# EAGLE board T14_SuperDuperBoardLayoutV01 (EAGLE 6.3)
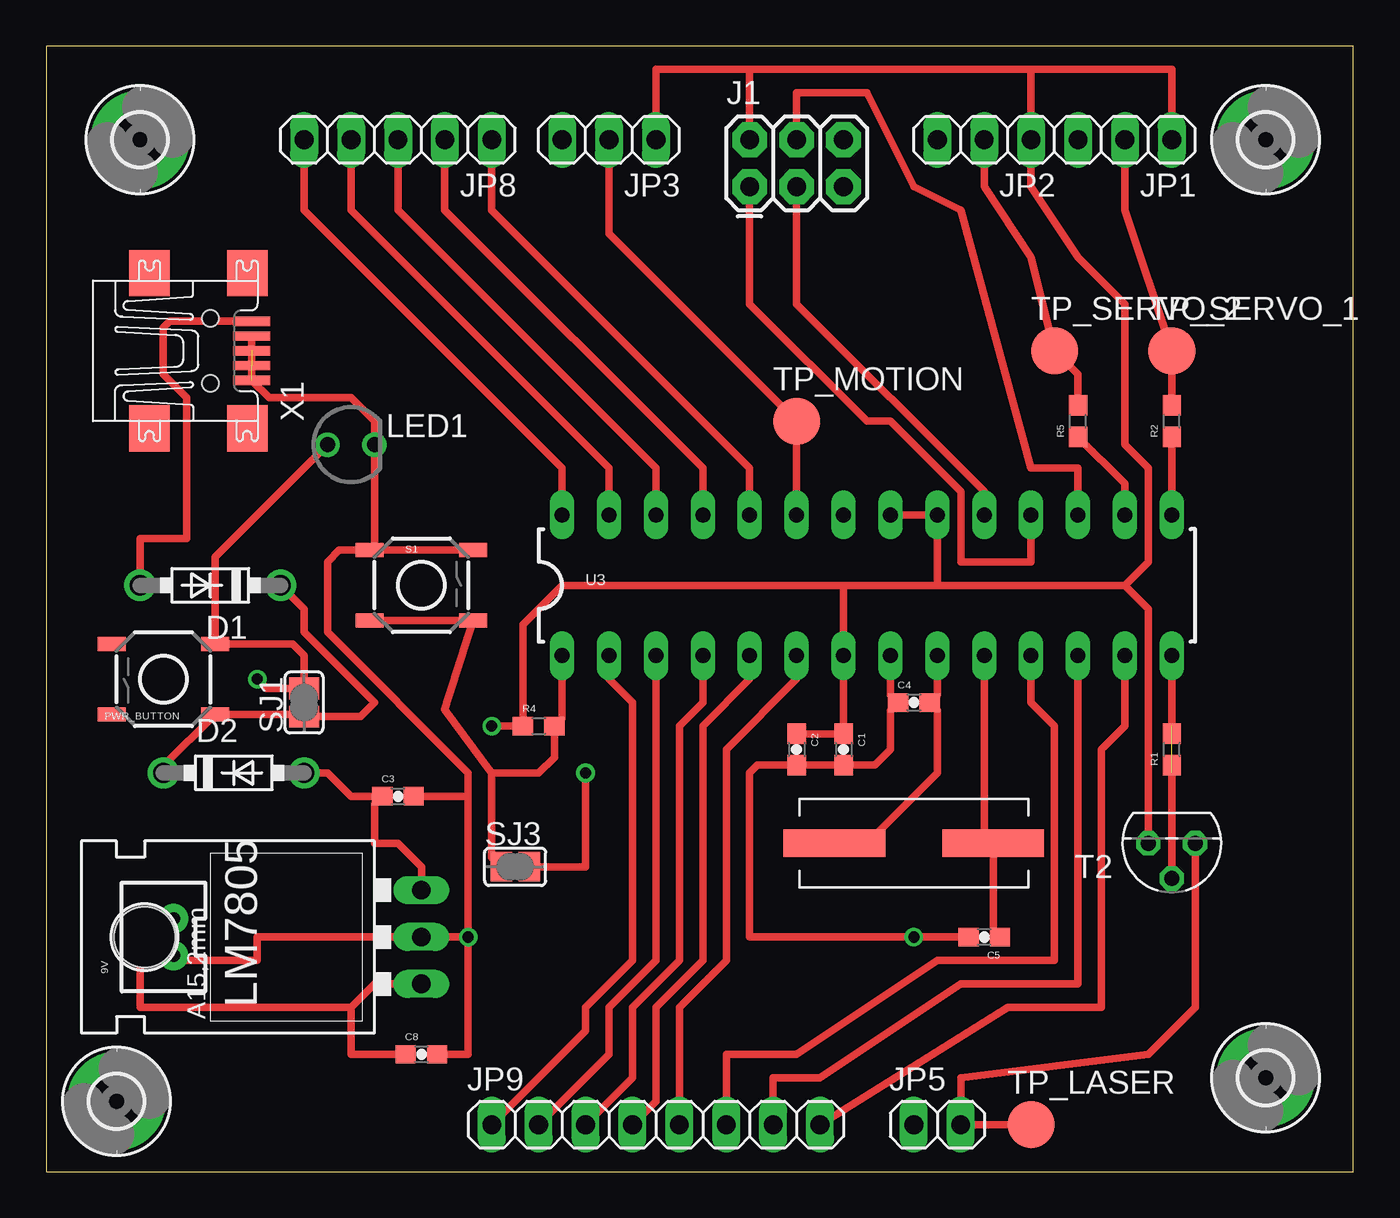
[diagram p0: board, top side]
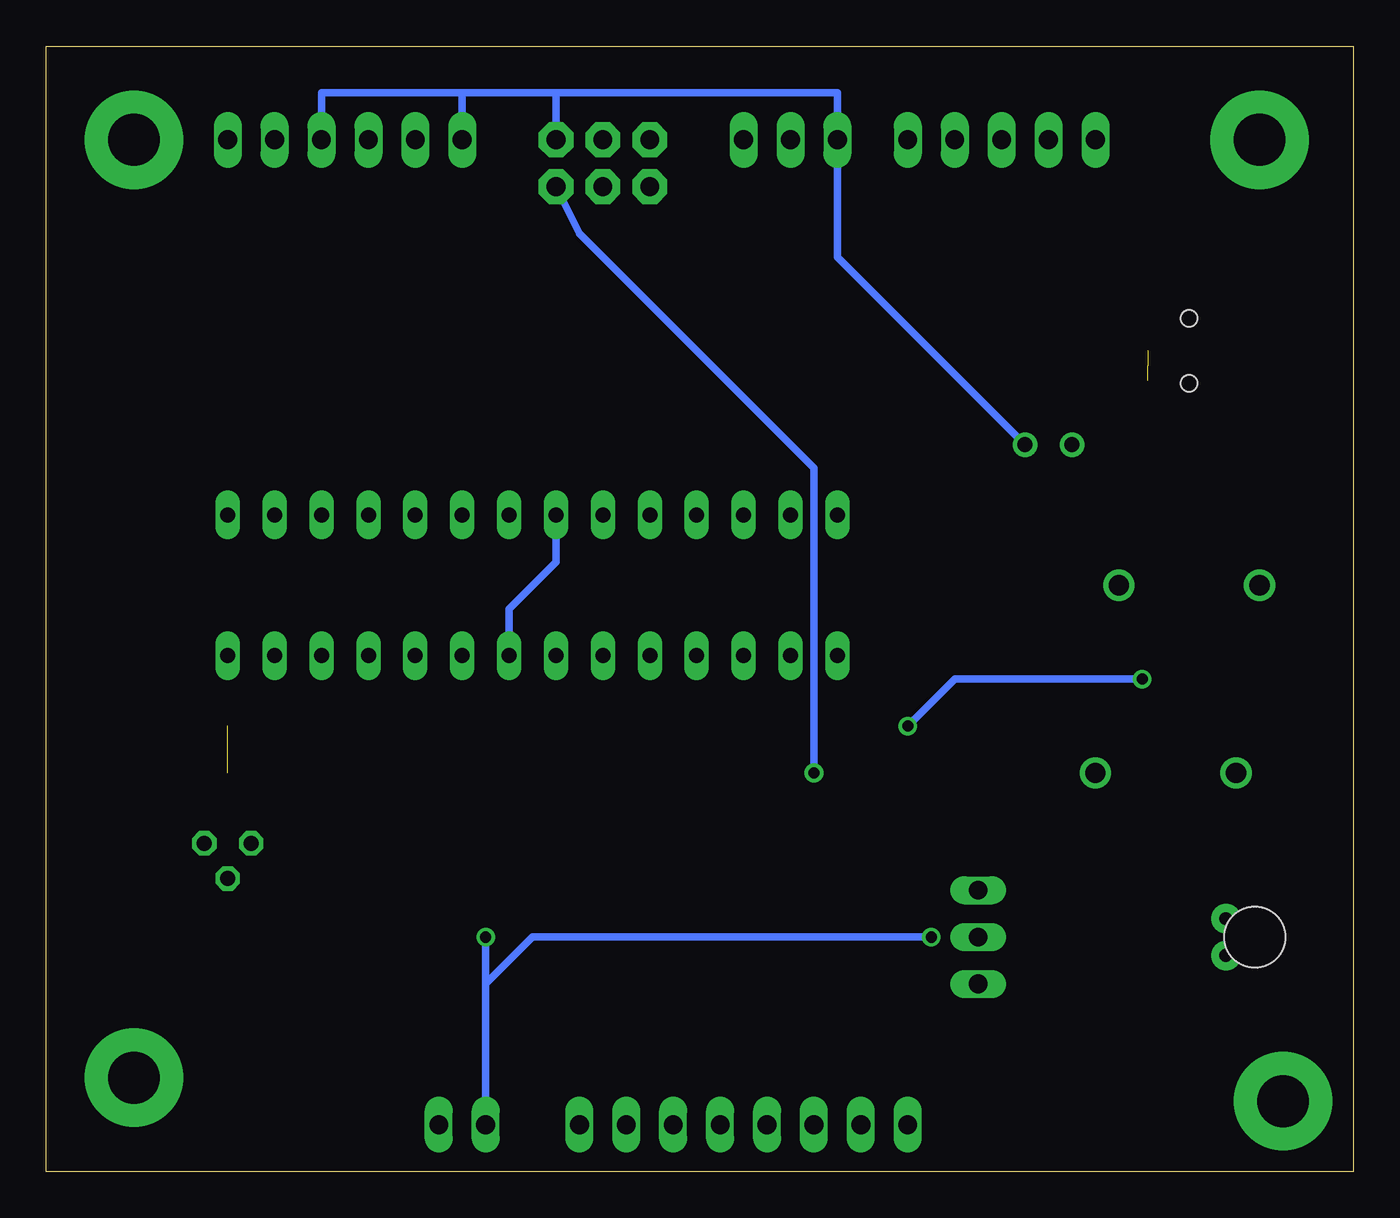
[diagram p1: board, bottom side, seen from below]

Size 70.79 x 60.95 mm. Coordinates in mm from the lower left corner, seen from the top.
Outline: 0,0 70.79,0 70.79,60.95 0,60.95 0,0
Copper layers (1*16): Top 0.035mm / dielectric 1.5mm / Bottom 0.035mm
Design rules "default": minimum track width 10mil, minimum drill 24mil, track to track 8mil, track to pad 8mil, pad to pad 8mil, via to via 8mil, smd to smd 8mil, copper to edge 40mil, drill to drill 8mil, minimum pad ring 10mil, minimum via ring 8mil, stop-mask expansion 4mil, vias tented up to drill 0mil, thermal gap 10mil

## Footprints (pad centres in the part's own frame; a part is rotated, then mirrored left to right if it is on the bottom)
JST-2-PTH-VERT = drill 0.7 pad 1.6: 1 -1,-0.55; 2 1,-0.55
0603-CAP = smd 1.1 x 1: 1 -0.85,0; 2 0.85,0
DO41-7.6 = drill 1.1 pad 1.7: A 3.81,0; C -3.81,0
2,8-PAD = drill 2.8 pad 5.334: B2,8 0,0
2X3 = drill 1.016 pad 1.88 octagon: 1 0,0; 2 0,2.54; 3 2.54,0; 4 2.54,2.54; 5 5.08,0; 6 5.08,2.54
1X03 = drill 1.016 long: 1 -2.54,0; 2 0,0; 3 2.54,0
1X02 = drill 1.016 long: 1 -1.27,0; 2 1.27,0
1X05 = drill 1.016 long: 1 -5.08,0; 2 -2.54,0; 3 0,0; 4 2.54,0; 5 5.08,0
1X08 = drill 1.016 long: 1 -8.89,0; 2 -6.35,0; 3 -3.81,0; 4 -1.27,0; 5 1.27,0; 6 3.81,0; 7 6.35,0; 8 8.89,0
LED3MM-NS = drill 0.813: A -1.27,0; K 1.27,0
78XXL = drill 1.016 long: GND 0,-3.81; IN -2.54,-3.81; OUT 2.54,-3.81 | hole 3.302: 0,11.176
TACTILE-SWITCH-SMD = smd 1.524 x 0.762: 1 -2.794,1.905; 2 2.794,1.905; 3 -2.794,-1.905; 4 2.794,-1.905
0603 = smd 1.1 x 1: 1 -0.85,0; 2 0.85,0
SJ = smd 1.168 x 1.6: 1 -0.762,0; 2 0.762,0
TO92 = drill 0.813 octagon: 1 1.27,0; 2 0,1.905; 3 -1.27,0
B2,54 = smd 2.54 x 2.54: TP 0,0
DIL28-3 = drill 0.813 long: 1 -16.51,-3.81; 2 -13.97,-3.81; 3 -11.43,-3.81; 4 -8.89,-3.81; 5 -6.35,-3.81; 6 -3.81,-3.81; 7 -1.27,-3.81; 8 1.27,-3.81; 9 3.81,-3.81; 10 6.35,-3.81; 11 8.89,-3.81; 12 11.43,-3.81; 13 13.97,-3.81; 14 16.51,-3.81; 15 16.51,3.81; 16 13.97,3.81; 17 11.43,3.81; 18 8.89,3.81; 19 6.35,3.81; 20 3.81,3.81; 21 1.27,3.81; 22 -1.27,3.81; 23 -3.81,3.81; 24 -6.35,3.81; 25 -8.89,3.81; 26 -11.43,3.81; 27 -13.97,3.81; 28 -16.51,3.81
UX60-MB-5ST = smd 2 x 0.5: 1 2.25,1.6; 2 2.25,0.8; 3 2.25,0; 4 2.25,-0.8; 5 2.25,-1.6 | smd 2.2 x 2.5: M1 -3.3,-4.2; M2 -3.3,4.2; M3 2,4.2; M4 2,-4.2 | hole 0.9: 0,-1.75; 0,1.75
CRYSTAL-SMD-10.5X4.8-2PIN = smd 5.5 x 1.5: P$1 -4.3,0; P$2 4.3,0

## Placement (x,y rotation side)
9V  M02JST-PTH-VERT  [JST-2-PTH-VERT]  6.35,12.7 90 top
C1  4.7uF  [0603-CAP]  43.18,22.86 270 top
C2  0.1uF  [0603-CAP]  40.64,22.86 270 top
C3  1uF  [0603-CAP]  19.05,20.32 0 top
C4  22pF  [0603-CAP]  46.99,25.4 0 top
C5  22pF  [0603-CAP]  50.8,12.7 180 top
C8  10uF  [0603-CAP]  20.32,6.35 0 top
D1  1N5817-B  [DO41-7.6]  8.89,31.75 180 top
D2  1N5817-B  [DO41-7.6]  10.16,21.59 0 top
H5  MOUNT-PAD-ROUND2.8  [2,8-PAD]  5.08,55.88 0 top
H6  MOUNT-PAD-ROUND2.8  [2,8-PAD]  3.81,3.81 0 top
H7  MOUNT-PAD-ROUND2.8  [2,8-PAD]  66.04,5.08 0 top
H8  MOUNT-PAD-ROUND2.8  [2,8-PAD]  66.04,55.88 0 top
J1  AVR_SPI_PRG_6PTH  [2X3]  38.1,53.34 0 top
JP1  [1X03]  58.42,55.88 180 top
JP2  [1X03]  50.8,55.88 180 top
JP3  [1X03]  30.48,55.88 180 top
JP5  [1X02]  48.26,2.54 0 top
JP8  [1X05]  19.05,55.88 180 top
JP9  [1X08]  33.02,2.54 0 top
LED1  [LED3MM-NS]  16.51,39.37 0 top
LM7805  [78XXL]  16.51,12.7 90 top
PWR_BUTTON  SWITCH-MOMENTARY-2SMD  [TACTILE-SWITCH-SMD]  6.35,26.67 180 top
R1  1k  [0603]  60.96,22.86 90 top
R2  33OHM  [0603]  60.96,40.64 90 top
R4  10k  [0603]  26.67,24.13 0 top
R5  33OHM  [0603]  55.88,40.64 90 top
S1  TAC_SWITCHSMD  [TACTILE-SWITCH-SMD]  20.32,31.75 0 top
SJ1  [SJ]  13.97,25.4 90 top
SJ3  [SJ]  25.4,16.51 0 top
T2  2N3904  [TO92]  60.96,17.78 180 top
TP_LASER  PTR1B2,54  [B2,54]  53.34,2.54 0 top
TP_MOTION  PTR1B2,54  [B2,54]  40.64,40.64 0 top
TP_SERVO_1  PTR1B2,54  [B2,54]  60.96,44.45 0 top
TP_SERVO_2  PTR1B2,54  [B2,54]  54.61,44.45 0 top
U3  ATMEGA328P_PDIP  [DIL28-3]  44.45,31.75 0 top
X1  MINI-USB-UX60-MB-5ST  [UX60-MB-5ST]  8.89,44.45 0 top
Y1  16MHz  [CRYSTAL-SMD-10.5X4.8-2PIN]  46.99,17.78 180 top

## Library data of the parts
9V J1 = SparkFun-Connectors
C1 = SparkFun-Capacitors; PROD_ID: CAP-08280
C2 = SparkFun-Capacitors; PROD_ID: CAP-00810
C3 C8 = SparkFun-Capacitors; PROD_ID: CAP-00810; VALUE: 0.1uF
C4 C5 = SparkFun-Capacitors; PROD_ID: CAP-08280; VALUE: 4.7uF
D1 D2 = diode
H5-H8 = holes
JP1-JP3 JP5 JP8 JP9 = pinhead
LED1 = SparkFun-LED
LM7805 = SparkFun-PowerIC
PWR_BUTTON S1 = SparkFun-Electromechanical; PROD_ID: SWCH-08247
R1 R4 = SparkFun-Resistors; PROD_ID: RES-08270; VALUE: 33OHM
R2 R5 = SparkFun-Resistors; PROD_ID: RES-08270
SJ1 SJ3 = jumper
T2 = transistor
TP_LASER TP_MOTION TP_SERVO_1 TP_SERVO_2 = testpad
U3 = SparkFun-DigitalIC
X1 = con-hirose; OC_FARNELL: unknown; OC_NEWARK: unknown
Y1 = SparkFun-FreqCtrl

## Nets
5V: C1.1 C2.1 J1.2 JP1.1 JP2.1 JP3.1 LED1.A PWR_BUTTON.3 R4.1 SJ1.2 T2.1 U3.7 U3.20 U3.21
GND: 9V.1 C1.2 C2.2 C3.2 C4.1 C5.2 C8.2 J1.6 JP1.3 JP2.3 JP3.3 JP5.1 LED1.K LM7805.GND S1.1 S1.2 U3.8 U3.22 X1.2 X1.3 X1.4 X1.5
N$1: D1.A X1.1
N$2: R2.1 U3.15
N$3: R1.2 T2.2
N$4: JP1.2 R2.2 TP_SERVO_1.TP
N$5: C5.1 U3.10 Y1.P$1
N$6: R5.1 U3.16
N$7: JP2.2 R5.2 TP_SERVO_2.TP
N$8: 9V.2 C8.1 LM7805.IN
N$9: R1.1 U3.14
N$10: C3.1 D2.A LM7805.OUT
N$11: J1.4 U3.17
N$12: J1.1 U3.18
N$13: J1.3 U3.19
N$14: R4.2 S1.3 S1.4 SJ3.1 U3.1
N$15: JP3.2 TP_MOTION.TP U3.23
N$16: C4.2 U3.9 Y1.P$2
N$17: JP8.5 U3.28
N$18: JP8.4 U3.27
N$19: JP8.3 U3.26
N$20: JP8.2 U3.25
N$21: JP8.1 U3.24
N$22: JP9.1 U3.2
N$23: JP9.2 U3.3
N$24: JP9.3 U3.4
N$25: JP9.4 U3.5
N$26: JP9.5 U3.6
N$27: JP9.6 U3.11
N$28: JP9.7 U3.12
N$29: JP9.8 U3.13
N$30: JP5.2 T2.3 TP_LASER.TP
N$31: D1.C D2.C PWR_BUTTON.1 SJ1.1
N$32: J1.5 SJ3.2

## Tracks (layer width: path | path; a pad name or v marks a point on that pad's centre or on a via)
5V  (via drill 0.6)
  Top 0.406: T2.1 59.69,30.48 58.42,31.75 | 58.42,31.75 48.26,31.75 | 43.18,31.75 U3.7 C1.1 C2.1 | 43.18,31.75 48.26,31.75 | U3.21 U3.20 48.26,31.75 | 43.18,31.75 27.94,31.75 25.82,29.63 R4.1 v24.13,24.13 | 58.42,31.75 59.69,33.02 59.69,38.1 58.42,39.37 58.42,46.99 55.88,49.53 53.34,53.34 JP2.1 53.34,59.69 | 53.34,59.69 38.1,59.69 | J1.2 38.1,59.69 | 38.1,59.69 33.02,59.69 JP3.1 | JP1.1 60.96,59.69 53.34,59.69 | LED1.A 9.14,33.27 PWR_BUTTON.3 13.34,28.57 13.97,27.94 SJ1.2 11.94,26.16 v11.43,26.67
  Bottom 0.406: v11.43,26.67 21.59,26.67 v24.13,24.13
GND  (via drill 0.6)  (2 unrouted)
  Top 0.406: U3.8 45.72,25.82 C4.1 45.72,24.98 45.72,22.86 44.87,22.01 C1.2 | C1.2 C2.2 | C1.2 38.52,22.01 38.1,21.59 38.1,12.7 v46.99,12.7 C5.2 | v22.86,12.7 22.86,6.35 C8.2 | v22.86,12.7 LM7805.GND 11.43,12.7 11.43,11.43 7.17,11.43 9V.1 | 22.86,20.32 v22.86,12.7 | C3.2 22.86,20.32 | 22.86,20.32 22.86,21.59 15.24,29.21 15.24,33.02 15.88,33.66 S1.2 S1.1 17.78,33.91 LED1.K 17.78,40.64 16.51,41.91 12.08,41.91 X1.5 X1.2
  Bottom 0.406: U3.22 43.18,33.02 45.72,30.48 U3.8 | JP5.1 46.99,10.16 | 46.99,10.16 v46.99,12.7 | 43.18,58.42 27.94,58.42 JP3.3 27.94,49.53 LED1.K | J1.6 43.18,58.42 | 43.18,58.42 48.26,58.42 | JP2.3 48.26,58.42 | 48.26,58.42 55.88,58.42 JP1.3 | v22.86,12.7 44.45,12.7 46.99,10.16
N$1
  Top 0.406: X1.1 6.68,46.05 6.35,45.72 6.35,43.18 7.62,41.91 7.62,34.29 5.08,34.29 D1.A
N$2
  Top 0.406: U3.15 R2.1
N$3  (1 unrouted)
  Top 0.406: T2.2 60.96,21.59
N$4
  Top 0.406: JP1.2 58.42,52.07 TP_SERVO_1.TP R2.2
N$5
  Top 0.406: U3.10 50.8,18.27 Y1.P$1 51.29,13.06 C5.1
N$6
  Top 0.406: U3.16 58.42,37.25 R5.1
N$7
  Top 0.406: R5.2 55.88,43.18 TP_SERVO_2.TP 53.34,49.53 50.8,53.34 JP2.2
N$8
  Top 0.406: LM7805.IN 17.78,10.16 16.51,8.89 | 16.51,8.89 16.51,6.35 C8.1 | 9V.2 6.08,13.7 5.08,12.7 5.08,8.89 16.51,8.89
N$9  (1 unrouted)
  Top 0.406: U3.14 60.96,24.13
N$10
  Top 0.406: D2.A 15.24,21.59 16.51,20.32 C3.1 17.78,19.9 17.78,17.78 19.05,17.78 20.32,16.51 LM7805.OUT
N$11
  Top 0.406: U3.17 55.88,38.1 53.34,38.1 49.53,52.07 46.99,53.34 44.45,58.42 40.64,58.42 J1.4
N$12
  Top 0.406: J1.1 38.1,46.99 44.45,40.64 45.72,40.64 49.53,36.83 49.53,33.02 53.34,33.02 U3.18
N$13
  Top 0.406: J1.3 40.64,46.99 50.8,36.83 U3.19
N$14
  Top 0.406: U3.1 27.94,24.55 R4.2 27.52,22.44 26.67,21.59 24.13,21.59 | 24.13,21.59 21.59,25.02 S1.4 S1.3 | 24.13,21.59 24.13,17.02 SJ3.1
N$15
  Top 0.406: JP3.2 30.48,50.8 TP_MOTION.TP U3.23
N$16
  Top 0.406: Y1.P$2 44.45,17.78 48.26,21.59 48.26,24.98 C4.2 48.26,25.82 U3.9
N$17
  Top 0.406: JP8.5 13.97,52.07 27.94,38.1 U3.28
N$18
  Top 0.406: JP8.4 16.51,52.07 30.48,38.1 U3.27
N$19
  Top 0.406: JP8.3 19.05,52.07 33.02,38.1 U3.26
N$20
  Top 0.406: JP8.2 21.59,52.07 35.56,38.1 U3.25
N$21
  Top 0.406: JP8.1 24.13,52.07 38.1,38.1 U3.24
N$22
  Top 0.406: U3.2 30.48,26.67 31.75,25.4 31.75,11.43 29.21,8.89 29.21,7.62 JP9.1
N$23
  Top 0.406: U3.3 33.02,11.43 30.48,8.89 30.48,6.35 JP9.2
N$24
  Top 0.406: U3.4 35.56,25.4 34.29,24.13 34.29,11.43 31.75,8.89 31.75,5.08 JP9.3
N$25
  Top 0.406: U3.5 38.1,26.67 35.56,24.13 35.56,11.43 33.02,8.89 33.02,3.81 JP9.4
N$26
  Top 0.406: U3.6 40.64,26.67 36.83,22.86 36.83,11.43 34.29,8.89 JP9.5
N$27
  Top 0.406: U3.11 53.34,25.4 54.61,24.13 54.61,11.43 48.26,11.43 40.64,6.35 36.83,6.35 JP9.6
N$28
  Top 0.406: U3.12 55.88,10.16 49.53,10.16 41.91,5.08 39.37,5.08 JP9.7
N$29
  Top 0.406: U3.13 58.42,24.13 57.15,22.86 57.15,8.89 52.07,8.89 JP9.8
N$30
  Top 0.406: T2.3 62.23,8.89 59.69,6.35 49.53,5.08 JP5.2 TP_LASER.TP
N$31
  Top 0.406: D2.C 6.35,21.97 PWR_BUTTON.1 13.84,24.77 SJ1.1 17.02,24.64 17.78,25.4 13.97,29.21 13.97,30.48 D1.C
N$32  (via drill 0.6)
  Top 0.406: SJ3.2 29.21,16.51 v29.21,21.59
  Bottom 0.406: v29.21,21.59 29.21,38.1 41.91,50.8 J1.5